# Altium PCB Project 9 Group 76.PcbDoc
Units mm, origin at the board's own origin, x right, y up, seen from the top; angles counter-clockwise.
Board outline 245.62 x 130.05 mm, 2 copper layers (Top Layer, Bottom Layer); 69 components, 100 nets, 332 pads, 92 vias.
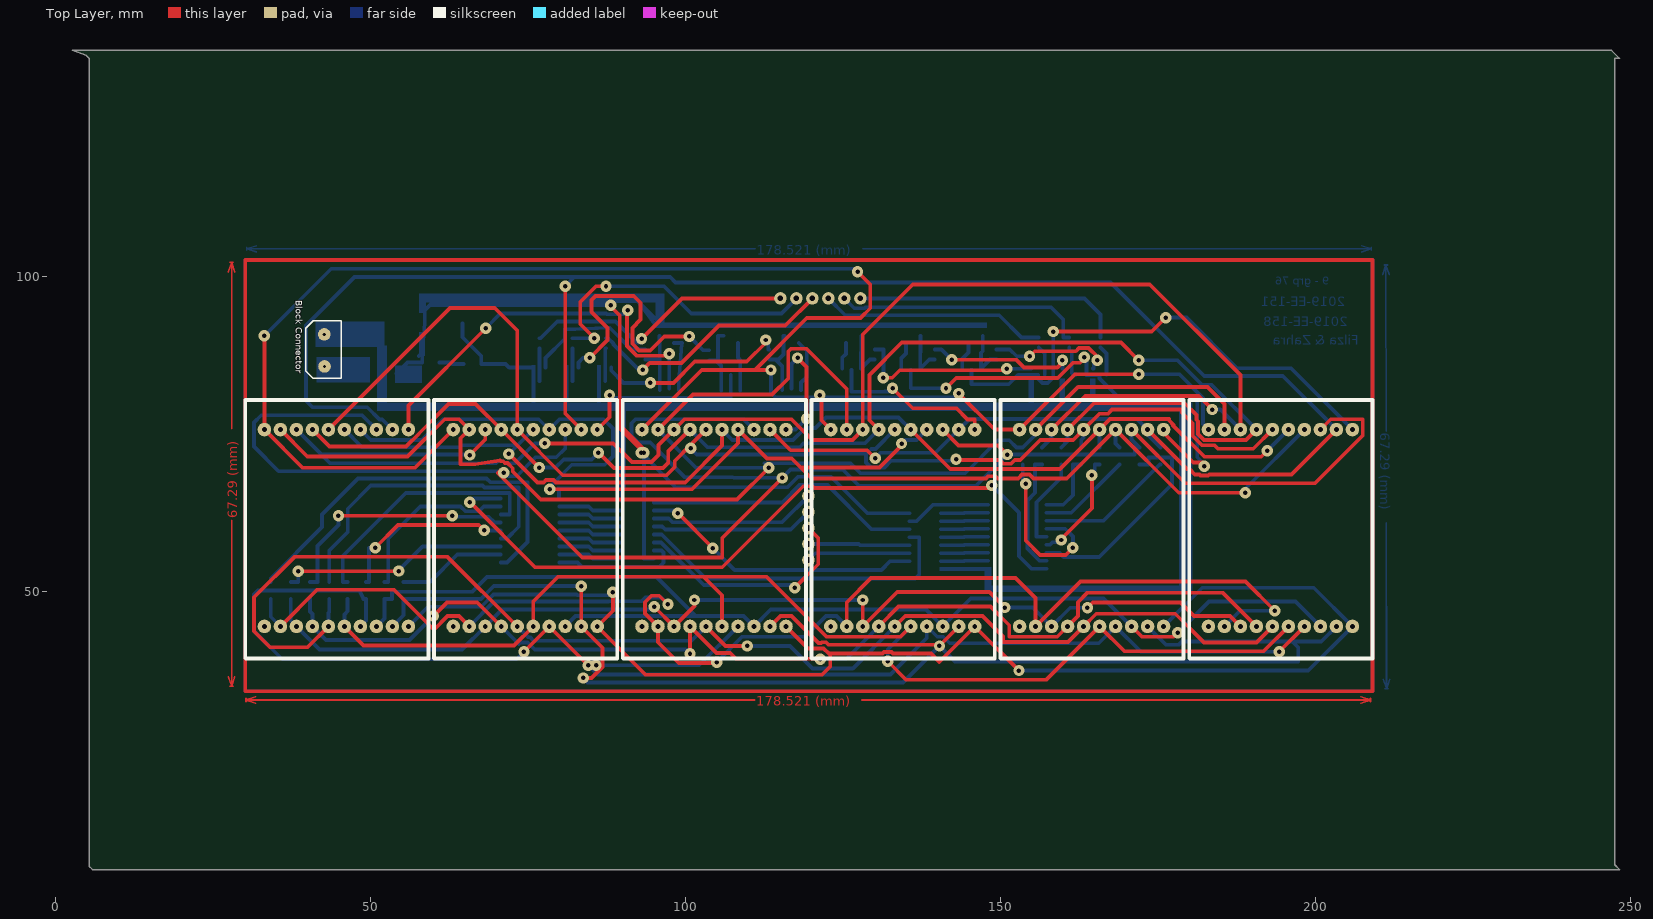
[diagram p0: Top Layer view]
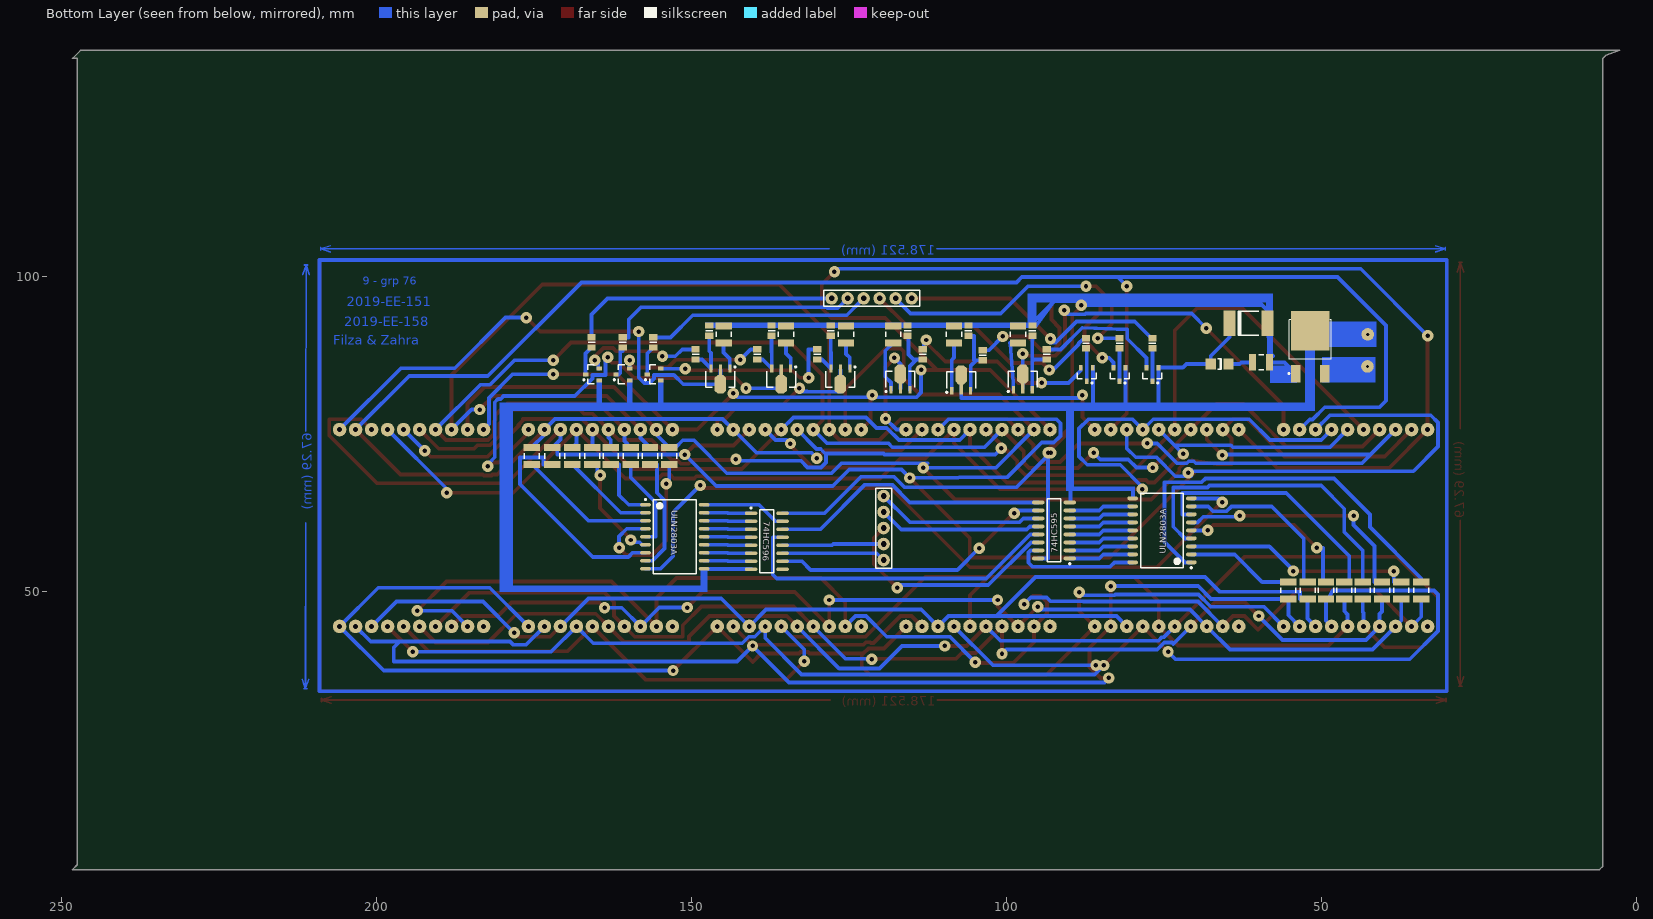
[diagram p1: Bottom Layer view, seen from below]

## Layer stack, top to bottom
Top Layer: signal copper 0.0356
Dielectric: dielectric 0.32, FR-4, Dk 4.8
Bottom Layer: signal copper 0.0356

## Board outline
2.667,135.89 247.015,135.89 248.285,134.62 247.523,134.62 247.523,6.604 248.285,5.842 5.842,5.842 5.334,6.35 5.334,134.62 4.826,135.128

## Design rules (kind name [scope] priority, off if disabled: settings)
Clearance [All] p1: gap=0.254
PolygonConnect [All] p1: connectstyle=Relief reliefconductorwidth=0.254 reliefentries=4 polygonreliefangle="90 Angle"
RoutingVias [All] p1: holewidth=0.711 width=1.8 viastyle="Through Hole" minholewidth=0.711 minwidth=1.8 maxholewidth=0.711 maxwidth=1.8
SilkscreenOverComponentPads [All] p1: minsilkscreentomaskgap=0.254
SolderMaskExpansion [All] p1: expansion=0.102
Width [All] p1: maxlimit=0.7 minlimit=0.5 preferedwidth=0.6 minimp=50.000000 maximp=50.000000 favimp=50.000000
27 further rules are at their usual default settings.

## Components (designator, comment, footprint, x,y, rotation, side; value= is the part's Value field where it differs from the comment)
74HC595 "Comment" SOIC127P602-16AN 92.456,59.69 r0 bottom
74HC596 "Comment" SOIC127P602-16AN 138.049,57.974 r180 bottom
ULN2803A "Comment" SOIC127P1030-18AL 152.654,58.674 r180 bottom
ULN2803A "Comment" SOIC127P1030-18AL 75.311,59.69 r0 bottom
? "Comment" "Alphanumeric display" 44.577,60.071 r0 top
? "Comment" "Alphanumeric display" 74.549,60.071 r0 top
? "Comment" "Alphanumeric display" 104.521,60.071 r0 top
? "Comment" "Alphanumeric display" 134.493,60.071 r0 top
? "Comment" "Alphanumeric display" 164.465,60.071 r0 top
? "Comment" "Alphanumeric display" 194.437,60.071 r0 top
? "Comment" SOT89L 116.84,83.693 r90 bottom
? "Comment" SOT89L 107.188,83.566 r90 bottom
? "Comment" SOT89L 97.409,83.693 r90 bottom
? "Comment" SOT89L 145.415,83.693 r270 bottom
? "Comment" SOT89L 135.763,83.693 r270 bottom
? "Comment" SOT89L 126.365,83.693 r270 bottom
? "Comment" SOT95P240-3RL 87.249,84.455 r270 bottom
? "Comment" SOT95P240-3RL 82.042,84.455 r270 bottom
? "Comment" SOT95P240-3RL 76.835,84.455 r270 bottom
? "Comment" SOT95P240-3RL 155.956,84.455 r0 bottom
? "Comment" SOT95P240-3RL 160.909,84.455 r0 bottom
? "Comment" SOT95P240-3RL 165.735,84.455 r0 bottom
? "Comment" RESC3225L 34.163,50.165 r90 bottom
? "Comment" RESC3225L 37.338,50.165 r90 bottom
? "Comment" RESC3225L 40.386,50.165 r90 bottom
? "Comment" RESC3225L 43.434,50.165 r90 bottom
? "Comment" RESC3225L 46.355,50.165 r90 bottom
? "Comment" RESC3225L 49.276,50.165 r90 bottom
? "Comment" RESC3225L 52.197,50.165 r90 bottom
? "Comment" RESC3225L 55.245,50.165 r90 bottom
? "Comment" RESC3225L 153.543,71.501 r90 bottom
? "Comment" RESC3225L 156.591,71.501 r90 bottom
? "Comment" RESC3225L 159.639,71.501 r90 bottom
? "Comment" RESC3225L 162.814,71.501 r90 bottom
? "Comment" RESC3225L 165.735,71.501 r90 bottom
? "Comment" RESC3225L 168.91,71.501 r90 bottom
? "Comment" RESC3225L 172.085,71.501 r90 bottom
? "Comment" RESC3225L 175.387,71.501 r90 bottom
? "Comment" RESC3225L 98.171,90.805 r90 bottom
? "Comment" RESC3225L 108.331,90.805 r90 bottom
? "Comment" RESC3225L 117.983,90.805 r90 bottom
? "Comment" RESC3225L 125.476,90.805 r90 bottom
? "Comment" RESC3225L 135.001,90.805 r90 bottom
? "Comment" RESC3225L 144.907,90.805 r90 bottom
? "Comment" RESC3225L 59.563,86.36 r180 bottom
? "Comment" RESC2012L 95.885,91.405 r270 bottom
? "Comment" RESC2012L 106.045,91.405 r270 bottom
? "Comment" RESC2012L 115.697,91.405 r270 bottom
? "Comment" RESC2012L 127.889,91.405 r270 bottom
? "Comment" RESC2012L 137.287,91.405 r270 bottom
? "Comment" RESC2012L 147.193,91.405 r270 bottom
? "Comment" RESC2012L 149.352,87.63 r270 bottom
? "Comment" RESC2012L 139.573,87.63 r270 bottom
? "Comment" RESC2012L 130.048,87.63 r270 bottom
? "Comment" RESC2012L 113.284,87.63 r270 bottom
? "Comment" RESC2012L 103.759,87.503 r270 bottom
? "Comment" RESC2012L 93.599,87.63 r270 bottom
? "Comment" RESC2012L 87.376,89.408 r270 bottom
? "Comment" RESC2012L 82.042,89.408 r270 bottom
? "Comment" RESC2012L 76.835,89.408 r270 bottom
? "Comment" RESC2012L 156.083,89.535 r270 bottom
? "Comment" RESC2012L 160.909,89.535 r270 bottom
? "Comment" RESC2012L 165.862,89.535 r270 bottom
? "Comment" "PCB Block Connector" 42.672,88.265 r270 top
? "Comment" CAPC7238L 61.595,92.583 r180 bottom
? "Comment" *DPAK228P998X235-3N 51.781,88.9 r180 bottom
? "Comment" CD3216-1206 66.167,86.106 r180 bottom
? "Comment" HDR1X5 119.507,65.151 r270 bottom
? "Comment" HDR1X6 127.762,96.52 r180 bottom

## Footprints (in the part's own frame and the unit in brackets; to place one, negate y for a bottom-side part, rotate by r counter-clockwise, add the part's x,y. Pads: shape width x height; smd on the part's side, far side on the other; paste and mask are expansions set on the pad)
*DPAK228P998X235-3N [mm]
  rect 1.5x2.8 smd: 1(-2.28,-4.34) 3(2.28,-4.34)
  rect 6.1x6.3 smd: 2(0,2.48)
  silkscreen extent -3.52,-4.42 3.33,4.2
"Alphanumeric display" [mil] "20 pins (10 on each side)"
  round 85 hole 30: 1(-450,-615) 2(-350,-615) 3(-250,-615) 4(-150,-615) 5(-50,-615) 6(50,-615) 7(150,-615) 8(250,-615) 9(350,-615) 10(450,-615) 11(450,615) 12(350,615) 13(250,615) 14(150,615) 15(50,615) 16(-50,615) 17(-150,615) 18(-250,615) 19(-350,615) 20(-450,615)
  silkscreen extent -570,-815 575,800
CAPC7238L [mm] "Chip Capacitor, Body 7.2x3.8mm, IPC High Density"
  rect 1.9x4 smd: 1(-3,0) 2(3,0)
  silkscreen extent -1.65,-1.9 1.65,1.9, body extent -3.8,-2.1 3.8,2.1, height 3.18
CD3216-1206 [mm] "Chip Diode; Body 3.2 x 1.6 mm (LxW typ)"
  rect 1.6x1.8 smd: 1(-1.4,0) 2(1.4,0)
  silkscreen extent -0.3,-0.8 0.3,0.8
HDR1X5 [mm] "Connector; Header; 5 Position"
  round 2 hole 0.9: 1(0,0) 2(2.54,0) 3(5.08,0) 4(7.62,0) 5(10.16,0)
  silkscreen extent -1.27,-1.27 11.43,1.27
HDR1X6 [mm] "Connector; Header; 6 Position"
  round 2 hole 0.9: 1(0,0) 2(2.54,0) 3(5.08,0) 4(7.62,0) 5(10.16,0) 6(12.7,0)
  silkscreen extent -1.27,-1.27 13.97,1.27
"PCB Block Connector" [mm]
  round 2 hole 0.5: 1(-2.547,-0.023) 2(2.547,0.023)
  silkscreen extent -4.7,-2.94 4.44,2.65
RESC2012L [mm] "Chip Resistor, Body 2.0x1.3mm, IPC High Density"
  rect 1x1.3 smd: 1(-0.8,0) 2(0.8,0)
  silkscreen extent 0,-0.55 0,0.55, body extent -1.07,-0.7 1.07,0.7, height 0.65
RESC3225L [mm] "Chip Resistor, Body 3.2x2.5mm, IPC High Density"
  rect 1.1x2.6 smd: 1(-1.35,0) 2(1.35,0)
  silkscreen extent -0.4,-1.2 0.4,1.2, body extent -1.68,-1.32 1.68,1.32, height 0.71
SOIC127P602-16AN [mm] "SOIC, 16-Leads, Body 9.9x3.9mm, Pitch 1.27mm, IPC Medium Density"
  oval 2x0.6 smd: 1(-2.5,4.445) 2(-2.5,3.175) 3(-2.5,1.905) 4(-2.5,0.635) 5(-2.5,-0.635) 6(-2.5,-1.905) 7(-2.5,-3.175) 8(-2.5,-4.445) 9(2.5,-4.445) 10(2.5,-3.175) 11(2.5,-1.905) 12(2.5,-0.635) 13(2.5,0.635) 14(2.5,1.905) 15(2.5,3.175) 16(2.5,4.445)
  silkscreen extent -2.62,-5 1.1,5.42, body extent -2,-5 2,5, height 1.73
SOIC127P1030-18AL [mm] "SOIC, 18-Leads, Body 11.6x7.5mm, Pitch 1.27mm, IPC High Density"
  oval 1.7x0.6 smd: 1(-4.65,5.08) 2(-4.65,3.81) 3(-4.65,2.54) 4(-4.65,1.27) 5(-4.65,0) 6(-4.65,-1.27) 7(-4.65,-2.54) 8(-4.65,-3.81) 9(-4.65,-5.08) 10(4.65,-5.08) 11(4.65,-3.81) 12(4.65,-2.54) 13(4.65,-1.27) 14(4.65,0) 15(4.65,1.27) 16(4.65,2.54) 17(4.65,3.81) 18(4.65,5.08)
  silkscreen extent -4.77,-5.9 3.4,6.05, body extent -3.8,-5.85 3.8,5.85, height 2.65
SOT89L [mm] "SOT89, 3-Leads, Body 4.5x2.4 mm, Pitch 1.5mm, Lead Span 4.1mm, IPC High Density"
  rect 1.2x0.5 smd: 1(-1.7,1.5) 3(-1.7,-1.5)
  rect 1.6x0.5 smd: 2(-1.5,0)
  oct 3x1.8 smd: 2(0.8,0)
  silkscreen extent -2.07,-2.3 1.3,2.43, body extent -1.3,-2.3 1.3,2.3, height 1.6
SOT95P240-3RL [mm] "SOT23, 3-Leads, Body 2.9x1.3mm, Pitch 0.95mm, Lead Span 2.3mm - Reverse Pinning, IPC High Density"
  rect 0.85x0.6 smd: 1(1.075,0) 2(-1.075,-0.95) 3(-1.075,0.95)
  silkscreen extent -0.3,-1.5 1.47,1.5, body extent -0.7,-1.5 0.7,1.5, height 1.1

## Via types
v1: diameter 1.8, hole 0.711, Top Layer to Bottom Layer, 92 vias

## Nets (pads, with @x,y where several pads share a name; then routed paths per layer and width w, separated by ;. In a path a pad name is that pad's centre, name@x,y a point inside that pad or via, vN(x,y) a via of type N, cw(c..) or ccw(c..) an arc to the next point about the centre after c; other vN are vias at no path point)
1: ?.2@34.163,51.515 ULN2803A.1@70.661,54.61 | length 64.4
  Bottom Layer w0.6: ?.2@34.163,51.515 34.163,52.07 42.31,60.217 42.31,62.23 48.025,67.945 68.423,67.945 69.027,67.342 74.93,67.342 74.93,57.861 71.679,54.61 ULN2803A.1@70.661,54.61
2: ?.2@37.338,51.515 ULN2803A.3@70.661,57.15 | length 36.7
  Top Layer w0.6: v1(38.532,53.213) 54.432,53.213 v1(54.458,53.238)
  Bottom Layer w0.6: ?.2@37.338,51.515 38.532,51.515 v1(38.532,53.213) ; v1(54.458,53.238) 54.458,53.34 58.268,57.15 ULN2803A.3@70.661,57.15
3: ?.2@40.386,51.515 ULN2803A.6@70.661,60.96 | length 39.3
  Top Layer w0.6: v1(44.907,62.027) v1(62.941,62.027)
  Bottom Layer w0.6: ?.2@40.386,51.515 41.58,51.515 41.58,57.226 44.907,60.554 v1(44.907,62.027) ; v1(62.941,62.027) 63.096,61.872 68.761,61.872 69.672,60.96 ULN2803A.6@70.661,60.96
4: ?.2@43.434,51.515 ULN2803A.4@70.661,58.42 | length 51.5
  Bottom Layer w0.6: ?.2@43.434,51.515 43.434,56.49 46.376,59.432 46.376,63.14 50.038,66.802 67.754,66.802 68.069,66.488 73.533,66.488 73.533,60.284 71.669,58.42 ULN2803A.4@70.661,58.42
5: ?.2@46.355,51.515 ULN2803A.7@70.661,62.23 | length 40.4
  Bottom Layer w0.6: ?.2@46.355,51.515 45.593,51.515 45.593,55.638 55.595,65.64 67.197,65.64 67.203,65.634 72.085,65.634 72.085,62.23 ULN2803A.7@70.661,62.23
6: ?.2@49.276,51.515 ULN2803A.5@70.661,59.69 | length 28.6
  Top Layer w0.6: v1(50.749,56.947) 54.331,60.528 67.183,60.528 v1(68.021,59.69)
  Bottom Layer w0.6: ?.2@49.276,51.515 49.759,51.515 49.759,56.947 v1(50.749,56.947) ; v1(68.021,59.69) ULN2803A.5@70.661,59.69
7: ?.2@52.197,51.515 ULN2803A.8@70.661,63.5 | length 28.1
  Bottom Layer w0.6: ?.2@52.197,51.515 52.807,51.515 52.807,58.42 57.887,63.5 64.295,63.5 65.069,62.726 67.203,62.726 67.977,63.5 ULN2803A.8@70.661,63.5
8: ?.2@55.245,51.515 ULN2803A.2@70.661,55.88 | length 17.2
  Bottom Layer w0.6: ?.2@55.245,51.515 59.411,51.515 63.776,55.88 ULN2803A.2@70.661,55.88
9: ?.1@175.387,70.151 ULN2803A.3@157.304,61.214 | length 21.8
  Bottom Layer w0.6: ULN2803A.3@157.304,61.214 166.346,61.214 175.283,70.151 ?.1@175.387,70.151
10: ?.1@172.085,70.151 ULN2803A.7@157.304,56.134 | length 35.5
  Bottom Layer w0.6: ULN2803A.7@157.304,56.134 159.35,56.134 160.028,55.457 165.667,55.457 177.241,67.031 177.241,71.272 173.507,71.272 173.507,70.151 ?.1@172.085,70.151
11: ?.1@168.91,70.151 ULN2803A.2@157.304,62.484 | length 14.8
  Bottom Layer w0.6: ULN2803A.2@157.304,62.484 161.243,62.484 ?.1@168.91,70.151
12: ?.1@165.735,70.151 ULN2803A.6@157.304,57.404 | length 17.8
  Top Layer w0.6: v1(159.639,58.166) 159.487,58.166 164.516,63.195 v1(164.516,68.453)
  Bottom Layer w0.6: ULN2803A.6@157.304,57.404 157.861,57.404 158.267,57.81 159.131,57.81 159.487,58.166 v1(159.639,58.166) ; v1(164.516,68.453) 164.973,68.91 164.973,70.151 ?.1@165.735,70.151
13: ?.1@162.814,70.151 ULN2803A.1@157.304,63.754 | length 11
  Bottom Layer w0.6: ULN2803A.1@157.304,63.754 159.969,63.754 161.493,65.278 161.493,70.151 ?.1@162.814,70.151
14: ?.1@159.639,70.151 ULN2803A.5@157.304,58.674 | length 14.7
  Bottom Layer w0.6: ULN2803A.5@157.304,58.674 155.702,58.674 155.702,64.166 159.639,68.103 ?.1@159.639,70.151
15: ?.1@156.591,70.151 ULN2803A.8@157.304,54.864 | length 18.8
  Bottom Layer w0.6: ?.1@156.591,70.151 155.448,70.151 155.448,69.304 155.488,69.264 155.488,65.66 154.28,64.451 154.28,56.794 156.21,54.864 ULN2803A.8@157.304,54.864
16: ?.1@153.543,70.151 ULN2803A.4@157.304,59.944 | length 27.7
  Top Layer w0.6: v1(154.026,67.107) 154.026,58.064 156.286,55.804 160.376,55.804 v1(161.493,56.921)
  Bottom Layer w0.6: ?.1@153.543,70.151 153.543,67.589 v1(154.026,67.107) ; ULN2803A.4@157.304,59.944 160.274,59.944 161.493,58.725 v1(161.493,56.921)
A1: ?.2@162.814,72.851 ?.16 | length 205.9
  Top Layer w0.6: ?.16@43.307,75.692 62.611,94.996 69.723,94.996 73.279,91.44 73.279,75.692 80.518,68.453 97.002,68.453 98.282,69.733 98.282,70.723 v1@100.813,73.254 ; v1(100.813,72.72) v1@100.813,73.254 ; ?.16@103.251,75.692 v1@100.813,73.254 ; v1(142.951,70.968) 143.053,70.866 149.887,70.866 150.477,70.276 151.681,70.276 152.272,70.866 153.143,70.866 156.318,74.041 161.544,74.041 163.195,75.692 165.71,78.207 167.056,78.207 167.716,78.867 178.816,78.867 178.816,78.359 180.52,76.655 180.52,74.662 181.977,73.205 183.97,73.205 184.531,72.644 190.119,72.644 ?.16@193.167,75.692
  Bottom Layer w0.6: v1(100.813,72.72) 101.778,71.755 119.385,71.755 119.512,71.882 128.772,71.882 ; 129.159,72.269 128.772,71.882 ; ?.16@133.223,75.692 130.15,72.619 ; v1(142.951,70.968) 142.723,70.739 132.639,70.739 131.572,69.672 129.458,69.672 128.645,70.485 128.645,71.755 128.772,71.882 ; ?.2@162.814,72.851 162.814,74.066 163.195,74.447 ?.16@163.195,75.692 ; 130.15,72.619 130.13,72.599 129.489,72.599 129.508,72.619 130.15,72.619
A2: ?.2@168.91,72.851 ?.14 | length 228.5
  Top Layer w0.6: v1(78.461,66.218) 101.016,66.218 108.331,73.533 108.331,75.692 112.922,71.101 116.875,71.101 118.304,69.672 ; v1(134.29,73.482) 134.29,73.152 130.81,69.672 118.304,69.672 ; v1(188.849,65.659) 188.849,66.294 188.214,65.659 178.308,65.659 168.275,75.692 160.528,67.945 155.244,67.945 154.628,68.561 153.423,68.561 152.808,67.945 149.579,67.945 149.243,68.281 148.039,68.281 147.702,67.945 120.031,67.945 118.304,69.672
  Bottom Layer w0.6: ?.14@48.387,75.692 50.038,74.041 58.166,74.041 61.468,77.343 76.708,77.343 78.359,75.692 80.01,77.343 86.995,77.343 88.467,75.871 88.467,71.411 87.165,70.109 81.945,70.109 78.461,66.624 v1(78.461,66.218) ; v1(134.29,73.482) 134.866,74.058 136.669,74.058 ?.14@138.303,75.692 ; ?.14@168.275,75.692 168.275,73.486 ?.2@168.91,72.851 ; v1(188.849,65.659) 188.849,66.294 ?.14@198.247,75.692
B: ?.2@175.387,72.851 ?.12 | length 335
  Top Layer w0.6: v1(80.899,98.476) 80.899,78.232 ?.12@83.439,75.692 ; ?.12@113.411,75.692 116.688,72.415 128.829,72.415 v1(130.099,71.145) ; ?.12@173.355,75.692 179.61,69.437 179.991,69.437 180.848,68.58 181.586,68.58 181.77,68.396 182.974,68.396 183.158,68.58 196.215,68.58 ?.12@203.327,75.692
  Bottom Layer w0.6: ?.12@53.467,75.692 51.841,77.318 51.41,77.318 49.479,79.248 40.767,79.248 39.751,80.264 39.751,92.202 47.453,99.904 82.328,99.904 ; v1(80.899,98.476) 82.328,99.904 ; v1(130.099,71.145) 130.958,72.004 139.695,72.004 143.383,75.692 145.059,77.368 171.679,77.368 173.355,75.692 173.355,74.883 ?.2@175.387,72.851 ; ?.12@203.327,75.692 194.818,84.201 182.336,84.201 167.477,99.06 98.425,99.06 97.581,99.904 82.328,99.904
b1: ?.2@93.599,86.83 ?.2@95.885,90.605 ?.3@95.909,81.993 | length 11.1
  Bottom Layer w0.6: ?.2@93.599,86.83 95.536,86.83 95.909,86.457 ; ?.2@95.885,90.605 95.885,89.991 95.909,89.967 95.909,86.457 ; ?.3@95.909,81.993 95.909,86.457
b2: ?.2@103.759,86.703 ?.2@106.045,90.605 ?.3@105.688,81.866 | length 11.4
  Bottom Layer w0.6: ?.2@103.759,86.703 104.775,86.703 ; ?.3@105.688,81.866 105.688,85.79 104.775,86.703 ; ?.2@106.045,90.605 105.156,90.605 105.156,86.703 104.775,86.703
b3: ?.2@113.284,86.83 ?.2@115.697,90.605 ?.3@115.34,81.993 | length 11
  Bottom Layer w0.6: ?.2@113.284,86.83 114.3,86.83 ; ?.3@115.34,81.993 115.34,85.79 114.3,86.83 ; ?.2@115.697,90.605 115.545,90.605 115.545,87.63 114.745,86.83 114.3,86.83
b4: ?.2@127.889,90.605 ?.2@130.048,86.83 ?.3@127.865,85.393 | length 8
  Bottom Layer w0.6: ?.2@127.889,90.605 127.889,88.01 127.865,87.986 127.865,85.393 129.302,86.83 ?.2@130.048,86.83
b5: ?.2@137.287,90.605 ?.2@139.573,86.83 ?.3@137.263,85.393 | length 8.1
  Bottom Layer w0.6: ?.2@137.287,90.605 137.287,88.01 137.263,87.986 137.263,85.393 138.7,86.83 ?.2@139.573,86.83
b6: ?.2@147.193,90.605 ?.2@149.352,86.83 ?.3@146.915,85.393 | length 8.4
  Bottom Layer w0.6: ?.2@147.193,90.605 147.193,88.137 146.915,87.859 146.915,85.393 148.352,86.83 ?.2@149.352,86.83
C: ?.2@153.543,72.851 ?.19 | length 248.9
  Top Layer w0.6: ?.19@35.687,75.692 39.954,71.425 55.869,71.425 61.769,77.326 64.025,77.326 65.659,75.692 64.281,74.314 64.281,70.193 66.569,70.193 70.558,70.793 70.682,70.669 71.064,70.669 71.356,70.377 71.76,70.377 72.574,69.563 72.574,69.031 77.013,64.592 108.179,64.592 v1(113.233,69.647) ; ?.19@95.631,75.692 101.194,81.255 113.741,81.255 116.307,83.82 116.307,88.087 116.745,88.525 119.228,88.525 125.603,82.15 ?.19@125.603,75.692 ; ?.19@155.575,75.692 162.331,82.448 182.88,82.448 185.547,79.781 ?.19@185.547,75.692
  Bottom Layer w0.6: ?.19@95.631,75.692 101.68,69.643 v1@113.23,69.643 ; v1(113.233,69.647) 112.522,70.358 126.205,70.358 127.791,68.772 144.401,68.772 149.625,73.996 151.398,73.996 152.543,72.851 153.543,72.851 155.575,74.883 ?.19@155.575,75.692
c1: ?.1@93.599,88.43 ?.2@77.785,85.53 | length 21.5
  Bottom Layer w0.6: ?.2@77.785,85.53 77.785,87.071 80.823,90.109 80.823,91.589 87.958,91.874 91.402,88.43 ?.1@93.599,88.43
c2: ?.1@103.759,88.303 ?.2@82.992,85.53 | length 44.3
  Top Layer w0.6: v1(84.811,87.097) 87.63,89.916 87.63,91.846 85.09,94.386 85.09,96.278 85.719,96.907 91.789,96.907 92.874,95.823 92.874,93.153 91.561,91.84 91.561,89.326 92.621,88.265 94.412,88.265 96.622,90.475 v1(100.609,90.475)
  Bottom Layer w0.6: ?.2@82.992,85.53 82.992,86.36 83.729,87.097 v1(84.811,87.097) ; v1(100.609,90.475) 102.781,88.303 ?.1@103.759,88.303
c3: ?.1@113.284,88.43 ?.2@88.199,85.53 | length 30.7
  Top Layer w0.6: v1(94.437,83.109) 98.095,83.109 101.473,86.487 109.728,86.487 112.725,89.484 v1(112.725,89.916)
  Bottom Layer w0.6: ?.2@88.199,85.53 88.199,85.08 90.17,83.109 v1(94.437,83.109) ; v1(112.725,89.916) 113.132,89.51 113.132,88.43 ?.1@113.284,88.43
c4: ?.1@130.048,88.43 ?.2@154.881,85.405 | length 29.9
  Top Layer w0.6: v1(131.414,83.929) 132.808,83.929 133.995,85.115 150.774,85.115 v1(151.003,85.344)
  Bottom Layer w0.6: ?.1@130.048,88.43 131.414,88.43 v1(131.414,83.929) ; v1(151.003,85.344) 151.171,85.344 ?.2@154.881,85.405
c5: ?.1@139.573,88.43 ?.2@159.834,85.405 | length 23.4
  Top Layer w0.6: v1(142.246,86.798) 152.46,86.798 153.711,85.547 159.029,85.547 159.842,86.36 v1(159.842,86.69)
  Bottom Layer w0.6: ?.1@139.573,88.43 140.614,88.43 v1(142.246,86.798) ; ?.2@159.834,85.405 159.842,85.405 v1(159.842,86.69)
c6: ?.1@149.352,88.43 ?.2@164.66,85.405 | length 19.8
  Top Layer w0.6: v1(154.61,87.325) 155.429,88.144 161.966,88.144 162.474,88.652 163.976,88.652 165.354,87.274 v1(165.354,86.69)
  Bottom Layer w0.6: ?.1@149.352,88.43 151.486,88.43 152.59,87.325 v1(154.61,87.325) ; ?.2@164.66,85.405 164.795,85.405 164.795,86.131 v1(165.354,86.69)
com: ?.10 | length 221
  Top Layer w0.6: v1(88.468,49.886) 88.468,46.939 85.979,44.45 93.65,36.779 121.666,36.779 122.987,38.1 122.987,40.024 121.92,40.957 ; ?.10@115.951,44.45 119.444,40.957 121.92,40.957 ; v1(152.933,37.44) 145.923,44.45 140.284,38.811 138.963,40.132 132.942,40.132 132.708,40.367 131.503,40.367 131.268,40.132 122.745,40.132 121.92,40.957
  Bottom Layer w0.6: ?.10@56.007,44.45 59.131,47.574 67.575,47.574 69.531,49.53 82.704,49.53 82.837,49.397 87.979,49.397 v1(88.468,49.886) ; v1(152.933,37.44) 198.857,37.44 205.867,44.45 199.72,50.597 182.042,50.597 ?.10@175.895,44.45
common: ULN2803A.9 | length 116.1
  Top Layer w0.6: v1(65.761,64.186) 76.098,53.848 105.842,53.848 118.699,66.705 120.151,66.705 120.435,66.421 148.234,66.421 v1(148.641,66.827)
  Bottom Layer w0.6: v1(65.761,64.186) 66.345,64.77 ULN2803A.9@70.661,64.77 ; v1(148.641,66.827) 152.959,62.509 152.959,55.575 154.94,53.594 ULN2803A.9@157.304,53.594
D1: ?.2@159.639,72.851 ?.17 | length 224.1
  Top Layer w0.6: ?.17@40.767,75.692 43.459,73 55.625,73 57.64,75.015 57.64,75.039 62.357,79.756 66.675,79.756 70.739,75.692 v1(76.759,69.672) ; v1(86.182,72.034) 88.621,69.596 96.437,69.596 97.242,70.401 97.242,72.223 ?.17@100.711,75.692 ; ?.17@130.683,75.692 129.21,77.165 129.21,84.379 134.337,89.506 169.142,89.506 v1(171.933,86.716) ; ?.17@160.655,75.692 164.846,79.883 179.248,79.883 181.099,78.032 181.099,77.284 181.374,77.009 181.374,75.015 182.33,74.059 184.324,74.059 188.993,74.058 ?.17@190.627,75.692
  Bottom Layer w0.6: v1(76.759,69.672) 79.375,69.672 80.666,70.963 85.111,70.963 v1(86.182,72.034) ; ?.17@100.711,75.692 103.505,72.898 118.132,72.898 118.777,73.543 128.534,73.543 ?.17@130.683,75.692 ; ?.2@159.639,72.851 160.655,73.867 ?.17@160.655,75.692 ; v1(171.933,86.716) 178.105,86.716 182.016,82.804 183.515,82.804 ?.17@190.627,75.692
D2: ?.2@165.735,72.851 ?.15 | length 181.2
  Top Layer w0.6: v1(71.958,71.831) 76.479,67.31 77.497,67.31 77.858,67.672 79.063,67.672 79.425,67.31 99.957,67.31 105.791,73.144 ?.15@105.791,75.692 ; ?.15@135.763,75.692 142.033,69.422 159.465,69.422 165.735,75.692 167.396,77.353 176.784,77.353 176.784,77.113 177.471,76.426 ; 177.399,76.355 182.38,71.374 191.389,71.374 v1(192.365,72.35)
  Bottom Layer w0.6: ?.15@45.847,75.692 48.641,72.898 64.078,72.898 64.381,73.201 73.328,73.201 ; v1(71.958,71.831) 73.328,73.201 ; ?.15@75.819,75.692 73.328,73.201 ; ?.15@105.791,75.692 107.425,74.058 117.086,74.058 118.993,75.965 120.656,75.965 122.313,77.622 133.833,77.622 ?.15@135.763,75.692 ; ?.2@165.735,72.851 ?.15@165.735,75.692 ; v1(192.365,72.35) ?.15@195.707,75.692
dp: ?.20 | length 294.5
  Top Layer w0.6: v1(33.147,90.602) 33.147,75.692 39.192,69.647 57.074,69.647 ?.20@63.119,75.692 ; ?.20@93.091,75.692 102.565,85.166 111.023,85.166 ; v1(113.563,85.166) 111.023,85.166 ; v1(121.31,81.178) 121.579,80.91 121.579,77.176 ?.20@123.063,75.692 ; v1(127.305,100.762) 129.337,98.73 129.337,94.971 127.762,93.396 119.253,93.396 111.023,85.166 ; v1(143.358,81.432) 149.098,75.692 153.035,75.692 161.823,84.48 v1(171.933,84.48)
  Bottom Layer w0.6: v1(33.147,90.602) 43.764,101.219 126.848,101.219 v1(127.305,100.762) ; v1(113.563,85.166) 113.563,81.559 114.3,80.823 121.31,80.823 v1(121.31,81.178) 121.672,80.817 142.742,80.817 v1(143.358,81.432) ; v1(171.933,84.48) 178.41,84.48 182.169,80.721 182.169,76.53 ?.20@183.007,75.692
ds: 74HC595.14 ?.3@119.507,60.071 | length 37.1
  Top Layer w0.6: v1(117.323,50.571) 121.082,54.331 121.082,58.496 ?.3@119.507,60.071
  Bottom Layer w0.6: 74HC595.14 96.114,57.785 102.895,51.003 116.891,51.003 v1(117.323,50.571)
E: ?.2@172.085,72.851 ?.13 | length 319.5
  Top Layer w0.6: v1(71.12,68.834) 71.12,68.961 70.866,69.215 70.587,69.215 70.18,68.809 83.591,55.397 105.816,55.397 105.816,58.496 v1(115.341,68.021) ; ?.13@140.843,75.692 143.348,73.187 149.622,73.187 v1(151.079,71.73) ; ?.13@170.815,75.692 179.324,67.183 199.923,67.183 207.518,74.778 207.518,77.343 202.438,77.343 ?.13@200.787,75.692
  Bottom Layer w0.6: ?.13@50.927,75.692 48.641,77.978 32.639,77.978 31.496,76.835 31.496,73 35.408,69.088 70.46,69.088 70.587,69.215 70.866,69.215 71.12,68.961 v1(71.12,68.834) ; v1@70.689,68.3 73.21,68.3 76.2,71.29 79.479,71.29 80.899,72.71 ?.13@80.899,75.692 ; ?.13@110.871,75.692 109.22,77.343 92.075,77.343 91.44,76.708 91.44,74.676 92.488,73.628 94.393,73.628 99.832,68.189 v1(115.341,68.021) 116.662,69.342 124.968,69.342 127.584,66.726 146.075,66.726 v1(151.079,71.73) 171.323,71.73 171.323,72.851 172.085,72.851 170.815,74.121 ?.13@170.815,75.692
F: ?.2@156.591,72.851 ?.18 | length 260.5
  Top Layer w0.6: v1(65.735,71.653) 68.199,74.117 ?.18@68.199,75.692 ; v1(77.673,73.508) 88.538,73.508 91.491,70.555 94.615,70.555 95.707,71.647 95.707,73.228 98.171,75.692 99.822,77.343 116.84,77.343 120.142,74.041 126.492,74.041 128.143,75.692 128.143,90.805 136.068,98.73 173.711,98.73 188.087,84.353 ?.18@188.087,75.692 ; ?.18@158.115,75.692 163.449,81.026 181.483,81.026 v1(183.636,78.873)
  Bottom Layer w0.6: ?.18@38.227,75.692 42.355,71.564 ; v1(65.735,71.653) 65.634,71.755 42.164,71.755 43.561,70.358 69.953,70.358 70.264,70.669 71.064,70.669 71.375,70.358 72.923,70.358 76.073,73.508 v1(77.673,73.508) ; ?.2@156.591,72.851 158.115,74.375 ?.18@158.115,75.692 ; v1(183.636,78.873) 184.906,78.873 ?.18@188.087,75.692
G1: ?.1@34.163,48.815 ?.2@35.687,44.45 ?.2@65.659,44.45 ?.2@95.631,44.45 ?.2@125.603,44.45 ?.2@155.575,44.45 ?.2@185.547,44.45 | length 215.5
  Top Layer w0.6: ?.2@35.687,44.45 41.516,50.279 53.701,50.279 60.063,43.917 62.23,46.084 64.025,46.084 ?.2@65.659,44.45 ; v1(97.206,47.955) 95.834,49.327 94.615,49.327 93.574,48.285 93.574,46.507 95.631,44.45 95.631,41.935 98.933,38.633 104.826,38.633 v1(104.978,38.786) ; ?.2@125.603,44.45 125.603,48.26 129.464,52.121 152.4,52.121 155.575,48.946 155.575,44.45 162.712,51.587 188.9,51.587 v1(193.548,46.939)
  Bottom Layer w0.6: ?.1@34.163,48.815 34.163,45.974 ?.2@35.687,44.45 ; ?.2@65.659,44.45 69.596,48.387 87.821,48.387 87.866,48.432 93.002,48.432 93.599,49.028 96.133,49.028 v1(97.206,47.955) ; v1(104.978,38.786) 109.017,42.824 110.312,42.799 118.999,42.799 122.284,46.084 123.969,46.084 ?.2@125.603,44.45 ; ?.2@185.547,44.45 188.036,46.939 v1(193.548,46.939)
G2: ?.1@55.245,48.815 ?.9 | length 239.4
  Top Layer w0.6: v1(83.439,50.851) 83.439,44.45 86.817,41.072 86.817,37.998 85.09,36.271 v1(83.744,36.271) ; ?.9@113.411,44.45 115.062,46.101 116.84,46.101 121.13,41.811 121.539,41.811 121.662,41.935 122.311,41.935 122.717,41.529 140.132,41.529 v1(140.31,41.351) 140.31,41.377 ?.9@143.383,44.45
  Bottom Layer w0.6: ?.9@53.467,44.45 55.245,46.228 55.245,48.815 67.517,48.815 69.553,50.851 v1(83.439,50.851) ; v1(83.744,36.271) 84.455,35.56 134.518,35.56 v1(140.31,41.351) 142.767,38.894 197.282,38.894 197.282,41.097 196.342,42.037 ; ?.9@173.355,44.45 176.251,41.554 178.338,41.554 178.821,42.037 200.914,42.037 ?.9@203.327,44.45
gnd: 74HC595.8 74HC596.8 ?.1@42.649,90.812 ?.1@64.595,92.583 ?.1@67.567,86.106 ?.2@51.781,91.38 ?.3@75.885,85.53 ?.3@81.092,85.53 ?.3@86.299,85.53 ?.3@154.881,83.505 ?.3@159.834,83.505 ?.3@164.66,83.505 ULN2803A.10 | length 16.3
  Bottom Layer w0.6: ?.1@64.595,92.583 64.595,90.351 67.567,87.379 67.567,86.106 71.425,86.106 72.001,85.53 ?.3@75.885,85.53
H: ?.1@37.338,48.815 ?.3@38.227,44.45 ?.3@68.199,44.45 ?.3@98.171,44.45 ?.3@128.143,44.45 ?.3@158.115,44.45 ?.3@188.087,44.45 | length 174.4
  Top Layer w0.6: v1(95.047,47.574) 98.171,44.45 101.422,47.701 v1(101.422,48.641) ; v1(128.143,48.641) 128.143,44.45 133.604,49.911 148.234,49.911 v1(150.698,47.447) ; v1(163.805,47.422) 164.643,48.26 178.562,48.26 180.738,46.084 186.453,46.084 ?.3@188.087,44.45
  Bottom Layer w0.6: ?.1@37.338,48.815 37.338,45.339 38.227,44.45 41.91,40.767 64.516,40.767 68.199,44.45 70.866,47.117 94.59,47.117 v1(95.047,47.574) ; v1(101.422,48.641) v1(128.143,48.641) ; v1(150.698,47.447) 155.118,47.447 158.115,44.45 161.087,47.422 v1(163.805,47.422)
I: ?.1@43.434,48.815 ?.5@43.307,44.45 ?.5@73.279,44.45 ?.5@103.251,44.45 ?.5@133.223,44.45 ?.5@163.195,44.45 ?.5@193.167,44.45 | length 208.1
  Top Layer w0.6: ?.5@43.307,44.45 40.005,41.148 34.036,41.148 31.496,43.688 31.496,49.073 37.916,55.493 62.236,55.493 ?.5@73.279,44.45 ; ?.5@103.251,44.45 106.35,41.351 v1(109.779,41.351) ; ?.5@133.223,44.45 134.874,46.101 147.158,46.101 150.403,42.857 150.403,41.962 160.707,41.962 163.195,44.45 165.202,46.457 177.741,46.457 182.288,41.91 190.627,41.91 ?.5@193.167,44.45
  Bottom Layer w0.6: ?.5@43.307,44.45 43.307,46.558 43.434,46.685 ?.1@43.434,48.815 ; ?.5@73.279,44.45 74.984,42.745 75.302,42.745 75.883,42.164 100.965,42.164 ?.5@103.251,44.45 ; v1(109.779,41.351) 116.574,41.351 120.136,37.789 126.562,37.789 ?.5@133.223,44.45
IN: ?.2@42.695,85.718 ?.3@49.501,84.56
J: ?.1@49.276,48.815 ?.7 | length 239.5
  Top Layer w0.6: v1(74.346,40.437) 78.359,44.45 v1(84.557,38.252) 84.557,38.278 v1(85.798,38.278) ; v1(194.234,40.437) ?.7@198.247,44.45
  Bottom Layer w0.6: ?.7@48.387,44.45 49.276,45.339 49.276,48.815 48.895,48.815 48.209,50.165 32.131,50.165 31.496,49.53 31.496,43.713 35.966,39.243 73.152,39.243 v1(74.346,40.437) ; v1(84.557,38.252) 85.979,36.83 132.545,36.83 138.303,42.588 138.303,44.45 139.948,42.805 140.912,42.805 141.934,41.783 165.608,41.783 168.275,44.45 172.288,40.437 v1(194.234,40.437) ; v1(85.798,38.278) 102.159,38.278 ?.7@108.331,44.45
K: ?.1@40.386,48.815 ?.4@40.767,44.45 ?.4@70.739,44.45 ?.4@100.711,44.45 ?.4@130.683,44.45 ?.4@160.655,44.45 ?.4@190.627,44.45 | length 180.9
  Top Layer w0.6: v1(59.969,46.101) 62.128,48.26 66.929,48.26 ?.4@70.739,44.45 ; v1(100.711,40.107) 100.711,44.45 104.921,40.24 107.112,40.24 108.033,39.319 121.514,39.319 121.437,39.243 v1(121.412,39.243) ; ?.4@130.683,44.45 133.833,47.6 148.412,47.6 151.384,44.628 151.384,42.816 159.021,42.816 160.655,44.45 162.294,46.089 162.294,48.273 163.83,49.809 185.268,49.809 ?.4@190.627,44.45
  Bottom Layer w0.6: ?.1@40.386,48.815 40.386,46.812 40.767,46.431 40.767,44.45 42.926,42.291 56.159,42.291 v1(59.969,46.101) ; ?.4@70.739,44.45 73.521,41.668 73.744,41.891 74.948,41.891 76.072,40.767 100.051,40.767 v1(100.711,40.107) ; v1(121.412,39.243) 121.488,39.319 125.552,39.319 ?.4@130.683,44.45
k1: ?.1@76.835,90.208 ?.6@115.062,96.52 | length 44
  Top Layer w0.6: v1(93.015,90.094) 99.441,96.52 ?.6@115.062,96.52
  Bottom Layer w0.6: ?.1@76.835,90.208 76.987,90.208 79.642,92.862 88.875,92.862 92.227,89.51 93.015,89.51 v1(93.015,90.094)
k2: ?.1@82.042,90.208 ?.5@117.602,96.52 | length 48.3
  Top Layer w0.6: v1(85.534,90.208) 83.29,92.452 83.29,95.961 85.779,98.45 v1(87.376,98.45)
  Bottom Layer w0.6: ?.1@82.042,90.208 v1(85.534,90.208) ; v1(87.376,98.45) 96.591,98.45 100.909,94.132 115.214,94.132 ?.5@117.602,96.52
k3: ?.1@87.376,90.208 ?.4@120.142,96.52 | length 39.6
  Top Layer w0.6: v1(93.193,85.166) 94.304,86.278 99.36,86.278 105.306,92.224 115.846,92.224 ?.4@120.142,96.52
  Bottom Layer w0.6: ?.1@87.376,90.208 87.709,90.208 88.58,89.337 88.58,89.22 92.634,85.166 v1(93.193,85.166)
k4: ?.1@156.083,90.335 ?.3@122.682,96.52 | length 36
  Bottom Layer w0.6: ?.3@122.682,96.52 125.349,93.853 149.809,93.853 153.327,90.335 ?.1@156.083,90.335
k5: ?.1@160.909,90.335 ?.2@125.222,96.52 | length 40.1
  Bottom Layer w0.6: ?.2@125.222,96.52 126.776,94.966 128.406,94.966 128.563,95.123 158.041,95.123 159.95,93.214 159.95,90.335 ?.1@160.909,90.335
k6: ?.1@127.762,96.52 ?.1@165.862,90.335 | length 42.8
  Bottom Layer w0.6: ?.1@127.762,96.52 163.322,96.52 165.862,93.98 ?.1@165.862,90.335
L: ?.1@46.355,48.815 ?.6@45.847,44.45 ?.6@75.819,44.45 ?.6@105.791,44.45 ?.6@135.763,44.45 ?.6@165.735,44.45 ?.6@195.707,44.45 | length 194.9
  Top Layer w0.6: ?.6@45.847,44.45 48.895,41.402 72.771,41.402 75.819,44.45 75.819,48.387 79.756,52.324 102.87,52.324 ; ?.6@105.791,44.45 105.791,49.403 102.87,52.324 ; v1(132.105,38.913) 135.052,35.966 157.251,35.966 165.735,44.45 169.672,40.513 191.77,40.513 ?.6@195.707,44.45 ; ?.6@135.763,44.45 134.112,42.799 122.4,42.799 112.875,52.324 102.87,52.324
  Bottom Layer w0.6: ?.6@45.847,44.45 45.847,46.355 46.355,46.863 ?.1@46.355,48.815 ; v1(132.105,38.913) 132.105,40.792 ?.6@135.763,44.45
M: ?.1@52.197,48.815 ?.8 | length 190.8
  Top Layer w0.6: ?.8@170.815,44.45 172.449,42.816 177.521,42.816 v1(178.13,43.426)
  Bottom Layer w0.6: ?.8@50.927,44.45 52.197,45.72 52.197,48.815 53.391,48.815 53.391,49.936 66.109,49.936 68.478,52.305 95.393,52.305 101.597,46.101 ; ?.8@80.899,44.45 82.55,46.101 101.597,46.101 ; ?.8@170.815,44.45 166.364,48.901 145.294,48.901 140.843,44.45 138.176,47.117 113.538,47.117 110.871,44.45 109.22,46.101 101.597,46.101 ; v1(178.13,43.426) 183.117,48.412 196.825,48.412 ?.8@200.787,44.45
MR: 74HC595.10 74HC596.10 | length 45.1
  Top Layer w0.6: v1(98.781,62.433) v1(104.343,56.871)
  Bottom Layer w0.6: 74HC595.10 98.349,62.865 v1(98.781,62.433) ; v1(104.343,56.871) 107.798,53.416 131.089,53.416 132.472,54.799 74HC596.10
OE: 74HC595.13 74HC596.13 | length 52.8
  Bottom Layer w0.6: 74HC595.13 96.215,59.055 103.2,52.07 136.474,52.07 137.109,52.705 137.109,58.609 74HC596.13
QA1: 74HC596.15 ULN2803A.18@148.004,63.754 | length 13.5
  Bottom Layer w0.6: 74HC596.15 136.689,61.149 139.294,63.754 ULN2803A.18@148.004,63.754
QA2: 74HC596.1 ULN2803A.17@148.004,62.484 | length 7.5
  Bottom Layer w0.6: 74HC596.1 144.221,62.419 144.286,62.484 ULN2803A.17@148.004,62.484
QB: 74HC596.2 ULN2803A.16@148.004,61.214 | length 7.5
  Bottom Layer w0.6: 74HC596.2 144.221,61.149 144.286,61.214 ULN2803A.16@148.004,61.214
QC: 74HC596.3 ULN2803A.15@148.004,59.944 | length 7.5
  Bottom Layer w0.6: 74HC596.3 144.221,59.879 144.286,59.944 ULN2803A.15@148.004,59.944
QD1: 74HC596.4 ULN2803A.14@148.004,58.674 | length 7.5
  Bottom Layer w0.6: 74HC596.4 144.221,58.609 144.286,58.674 ULN2803A.14@148.004,58.674
QD2: 74HC596.5 ULN2803A.13@148.004,57.404 | length 7.5
  Bottom Layer w0.6: 74HC596.5 144.221,57.339 144.286,57.404 ULN2803A.13@148.004,57.404
QE: 74HC596.6 ULN2803A.12@148.004,56.134 | length 7.5
  Bottom Layer w0.6: 74HC596.6 144.221,56.069 144.286,56.134 ULN2803A.12@148.004,56.134
QF: 74HC596.7 ULN2803A.11@148.004,54.864 | length 7.5
  Bottom Layer w0.6: 74HC596.7 144.221,54.799 144.286,54.864 ULN2803A.11@148.004,54.864
QG1: 74HC595.15 ULN2803A.18@79.961,54.61 | length 20.4
  Bottom Layer w0.6: ULN2803A.18@79.961,54.61 82.855,54.61 83.541,53.924 95.885,53.924 96.52,54.559 96.52,56.171 96.176,56.515 74HC595.15
QG2: 74HC595.1 ULN2803A.17@79.961,55.88 | length 10.3
  Bottom Layer w0.6: ULN2803A.17@79.961,55.88 84.633,55.88 85.268,55.245 74HC595.1
QH: 74HC595.2 ULN2803A.16@79.961,57.15 | length 10.3
  Bottom Layer w0.6: ULN2803A.16@79.961,57.15 84.633,57.15 85.268,56.515 74HC595.2
QI: 74HC595.3 ULN2803A.15@79.961,58.42 | length 10.3
  Bottom Layer w0.6: ULN2803A.15@79.961,58.42 84.633,58.42 85.268,57.785 74HC595.3
QJ: 74HC595.4 ULN2803A.14@79.961,59.69 | length 10.3
  Bottom Layer w0.6: ULN2803A.14@79.961,59.69 84.633,59.69 85.268,59.055 74HC595.4
QK: 74HC595.5 ULN2803A.13@79.961,60.96 | length 10.3
  Bottom Layer w0.6: ULN2803A.13@79.961,60.96 84.633,60.96 85.268,60.325 74HC595.5
QL: 74HC595.6 ULN2803A.12@79.961,62.23 | length 10.3
  Bottom Layer w0.6: ULN2803A.12@79.961,62.23 84.633,62.23 85.268,61.595 74HC595.6
QM: 74HC595.7 ULN2803A.11@79.961,63.5 | length 10.3
  Bottom Layer w0.6: ULN2803A.11@79.961,63.5 84.633,63.5 85.268,62.865 74HC595.7
r1: ?.1@98.171,89.455 ?.1@98.909,81.993 | length 8.7
  Bottom Layer w0.6: ?.1@98.171,89.455 99.422,89.455 99.413,89.353 98.909,83.186 ?.1@98.909,81.993
r2: ?.1@108.331,89.455 ?.1@108.688,81.866 | length 7.7
  Bottom Layer w0.6: ?.1@108.331,89.455 108.331,87.122 108.688,86.765 ?.1@108.688,81.866
r3: ?.1@117.983,89.455 ?.1@118.34,81.993 | length 8.4
  Bottom Layer w0.6: ?.1@117.983,89.455 119.235,88.203 119.235,84.081 118.34,83.186 ?.1@118.34,81.993
r4: ?.1@124.865,85.393 ?.1@125.476,89.455 | length 4.3
  Bottom Layer w0.6: ?.1@124.865,85.393 124.865,87.097 125.476,87.708 ?.1@125.476,89.455
r5: ?.1@134.263,85.393 ?.1@135.001,89.455 | length 4.4
  Bottom Layer w0.6: ?.1@134.263,85.393 134.263,87.046 135.001,87.784 ?.1@135.001,89.455
r6: ?.1@143.915,85.393 ?.1@144.907,89.455 | length 4.5
  Bottom Layer w0.6: ?.1@143.915,85.393 143.915,86.919 144.907,87.911 ?.1@144.907,89.455
res: ?.1@60.913,86.36 ?.2@64.767,86.106 | length 4
  Bottom Layer w0.6: ?.1@60.913,86.36 62.713,86.36 62.967,86.106 ?.2@64.767,86.106
ser1: 74HC595.9 74HC596.14 | length 44.7
  Bottom Layer w0.6: 74HC595.9 115.367,64.135 118.186,66.954 122.444,66.954 129.52,59.879 74HC596.14
ser2: 74HC596.9
SHCP: 74HC595.11 ?.1@119.507,65.151 | length 26.5
  Bottom Layer w0.6: 74HC595.11 97.324,61.595 97.946,60.973 115.329,60.973 ?.1@119.507,65.151
SHCP1: 74HC596.11 ?.5@119.507,54.991 | length 16.5
  Bottom Layer w0.6: ?.5@119.507,54.991 120.585,56.069 74HC596.11
STCP: 74HC595.12 ?.2@119.507,62.611 | length 25.9
  Bottom Layer w0.6: 74HC595.12 96.263,60.325 96.771,59.817 116.713,59.817 ?.2@119.507,62.611
STCP2: 74HC596.12 ?.4@119.507,57.531 | length 16.1
  Bottom Layer w0.6: ?.4@119.507,57.531 127.508,57.531 127.7,57.339 74HC596.12
t1: ?.2@97.409,82.193 ?.2@97.409,84.493 ?.11@56.007,75.692 | length 64.1
  Top Layer w0.6: ?.11@56.007,75.692 56.007,79.527 v1(68.275,91.796) ; v1(90.805,94.615) 90.983,94.615 91.008,94.59 90.707,94.288 90.707,88.97 92.275,87.401 97.079,87.401 v1(97.409,87.732)
  Bottom Layer w0.6: v1(68.275,91.796) 70.587,94.107 87.428,94.107 87.536,93.999 90.418,93.999 90.83,94.412 90.83,94.59 v1(90.805,94.615) ; ?.2@97.409,82.193 97.409,84.493 v1(97.409,87.732)
t2: ?.2@107.188,82.066 ?.2@107.188,84.366 ?.11@85.979,75.692 | length 29.4
  Top Layer w0.6: ?.11@85.979,75.692 87.935,77.648 v1(87.935,81.178)
  Bottom Layer w0.6: v1(87.935,81.178) 88.417,80.696 107.188,80.696 107.188,82.066 ?.2@107.188,84.366
t3: ?.2@116.84,82.193 ?.2@116.84,84.493 ?.11@115.951,75.692 | length 19.5
  Top Layer w0.6: v1(117.78,87.071) 119.202,85.649 v1(119.202,77.419)
  Bottom Layer w0.6: ?.11@115.951,75.692 117.475,75.692 v1(119.202,77.419) ; ?.2@116.84,82.193 116.84,84.493 116.84,86.131 v1(117.78,87.071)
t4: ?.2@126.365,82.893 ?.2@126.365,85.193 ?.11@145.923,75.692 | length 27.3
  Top Layer w0.6: v1(132.867,82.271) 136.068,79.07 143.027,79.07 144.78,77.318 145.923,77.318 ?.11@145.923,75.692
  Bottom Layer w0.6: ?.2@126.365,85.193 126.365,82.893 126.365,81.686 131.623,81.686 131.674,81.737 132.867,81.737 v1(132.867,82.271)
t5: ?.2@135.763,82.893 ?.2@135.763,85.193 ?.11@175.895,75.692 | length 75.4
  Top Layer w0.6: v1(141.351,82.271) 142.967,83.887 159.096,83.887 161.519,86.309 162.636,86.309 163.322,86.995 v1(163.322,87.198) ; ?.11@175.895,75.692 175.895,75.184 180.594,70.485 182.118,70.485 182.372,70.231 v1(182.372,69.85)
  Bottom Layer w0.6: ?.2@135.763,85.193 135.763,82.893 135.763,82.271 v1(141.351,82.271) ; v1(163.322,87.198) 163.678,86.843 163.678,84.379 165.735,84.379 165.735,83.82 168.529,81.026 179.832,81.026 180.294,80.564 180.696,80.564 181.229,80.031 181.229,71.298 182.042,70.485 182.118,70.485 182.372,70.231 v1(182.372,69.85)
t6: ?.2@145.415,82.893 ?.2@145.415,85.193 ?.11@205.867,75.692 | length 80.2
  Top Layer w0.6: v1(158.394,91.262) 174.015,91.262 v1(176.225,93.472)
  Bottom Layer w0.6: ?.2@145.415,85.193 145.415,82.893 145.415,82.88 151.308,82.88 152.806,84.379 155.956,84.379 155.956,83.82 156.693,83.083 157.505,83.083 158.388,83.966 158.388,91.256 v1(158.394,91.262) ; v1(176.225,93.472) 179.546,93.472 187.597,85.42 196.139,85.42 ?.11@205.867,75.692
vcc: 74HC595.16 74HC596.16 ?.1@54.061,84.56 ?.1@95.885,92.205 ?.1@106.045,92.205 ?.1@115.697,92.205 ?.1@127.889,92.205 ?.1@137.287,92.205 ?.1@147.193,92.205 ?.2@58.213,86.36 ?.2@58.595,92.583 ?.2@98.171,92.155 ?.2@108.331,92.155 ?.2@117.983,92.155 ?.2@125.476,92.155 ?.2@135.001,92.155 ?.2@144.907,92.155 | length 225.5
  Top Layer w0.6: v1(88.138,95.453) 88.138,95.226 89.554,93.81 89.554,76.409 ; v1(92.964,72.009) 93.125,72.218 v1@93.152,72.253 ; v1(93.396,72.009) v1@93.152,72.253 ; 89.554,76.409 89.554,75.851 v1@93.152,72.253 ; 89.554,76.409 93.396,72.568 v1@93.152,72.253
  Bottom Layer w0.6: ?.1@54.061,84.56 55.861,86.36 58.213,86.36 58.213,87.931 ; 57.658,87.376 58.213,87.931 ; v1(92.964,72.009) v1@93.396,71.577 ; v1(93.396,72.009) v1@93.396,71.577 ; 74HC595.16 93.396,55.245 v1@93.396,71.577 ; ?.1@95.885,92.205 95.317,92.205 92.472,96.061 ; ?.2@135.001,92.155 125.476,92.155 117.983,92.155 108.331,92.155 98.171,92.155 96.378,92.155 92.472,96.061 ; 74HC596.16 128.894,62.419 123.114,68.199 117.856,68.199 116.205,66.548 98.425,66.548 v1@93.396,71.577 ; 58.213,87.931 58.595,92.583 58.595,94.615 59.433,95.453 ; 59.433,95.453 v1(88.138,95.453) v1@87.53,96.061 ; 59.433,95.453 60.041,96.061 v1@87.53,96.061 ; v1@87.53,96.061 87.538,96.069 92.464,96.069 92.472,96.061
x1: ?.1@76.835,83.38 ?.2@76.835,88.608 | length 5.2
  Bottom Layer w0.6: ?.1@76.835,83.38 ?.2@76.835,88.608
x2: ?.1@82.042,83.38 ?.2@82.042,88.608 | length 5.2
  Bottom Layer w0.6: ?.1@82.042,83.38 ?.2@82.042,88.608
x3: ?.1@87.249,83.38 ?.2@87.376,88.608 | length 5.4
  Bottom Layer w0.6: ?.1@87.249,83.38 87.249,85.636 87.243,85.643 87.243,88.608 ?.2@87.376,88.608
x4: ?.1@157.031,84.455 ?.2@156.083,88.735 | length 4.7
  Bottom Layer w0.6: ?.2@156.083,88.735 157.031,87.787 ?.1@157.031,84.455
x5: ?.1@161.984,84.455 ?.2@160.909,88.735 | length 5.2
  Bottom Layer w0.6: ?.2@160.909,88.735 160.909,88.135 161.302,88.135 161.302,84.697 161.544,84.455 ?.1@161.984,84.455
x6: ?.1@166.81,84.455 ?.2@165.862,88.735 | length 4.7
  Bottom Layer w0.6: ?.2@165.862,88.735 166.81,87.787 ?.1@166.81,84.455
pads on no net: ?.1@33.147,44.45 ?.1@63.119,44.45 ?.1@93.091,44.45 ?.1@123.063,44.45 ?.1@153.035,44.45 ?.1@183.007,44.45
copper on no net: | length 1447.8
  Top Layer w0.254: 27.432,36.469 27.94,34.945 ; 27.432,100.711 27.94,102.235 ; 27.686,34.945 28.194,34.945 ; 27.686,102.235 28.194,102.235 ; 27.94,61.328 27.94,34.945 ; 27.94,75.852 27.94,102.235 ; 28.448,36.469 27.94,34.945 ; 28.448,100.711 27.94,102.235 ; 30.224,32.512 30.224,33.02 ; 31.748,32.258 30.224,32.766 ; 31.748,33.274 30.224,32.766 ; 110.952,32.766 30.224,32.766 ; 128.016,32.766 208.745,32.766 ; 207.221,32.258 208.745,32.766 ; 207.221,33.274 208.745,32.766 ; 208.745,32.512 208.745,33.02
  Top Layer w0.6: 30.099,34.163 30.099,102.616 209.042,102.616 209.042,34.163 30.099,34.163
  Bottom Layer w0.254: 30.351,104.14 30.351,104.648 ; 31.875,103.886 30.351,104.394 ; 31.875,104.902 30.351,104.394 ; 111.079,104.394 30.351,104.394 ; 128.143,104.394 208.872,104.394 ; 207.348,103.886 208.872,104.394 ; 207.348,104.902 208.872,104.394 ; 208.872,104.14 208.872,104.648 ; 210.68,100.297 211.186,101.822 ; 210.777,36.055 211.288,34.532 ; 210.932,101.822 211.44,101.823 ; 211.034,34.532 211.542,34.533 ; 211.226,75.439 211.186,101.822 ; 211.248,60.915 211.288,34.532 ; 211.696,100.299 211.186,101.822 ; 211.793,36.057 211.288,34.532
  Bottom Layer w0.6: 30.099,34.163 30.099,102.616 209.042,102.616 209.042,34.163 30.099,34.163

## Other copper
Top Layer:
  text "67.29 (mm)" at 28.854,61.582 h1.52 r90
  text "178.521 (mm)" at 111.206,31.852 h1.52
Bottom Layer:
  rectangle net gnd: 147.447,49.911 148.59,53.721
  rectangle net gnd: 147.447,49.911 180.467,50.927
  rectangle net gnd: 178.308,49.911 180.467,79.883
  rectangle net gnd: 140.335,53.213 148.59,53.848
  rectangle net gnd: 164.211,79.502 165.1,83.82
  rectangle net gnd: 159.385,79.121 160.274,83.82
  rectangle net gnd: 154.432,79.502 155.321,83.82
  rectangle net gnd: 80.772,79.756 81.407,85.979
  rectangle net gnd: 75.565,78.74 76.2,85.979
  rectangle net gnd: 85.979,79.756 86.614,85.979
  rectangle net gnd: 89.281,66.675 90.551,78.994
  rectangle net gnd: 52.578,78.613 180.467,80.01
  rectangle net gnd: 51.054,78.613 52.578,89.027
  rectangle net vcc: 95.25,91.821 96.647,95.885
  rectangle net vcc: 58.801,95.885 96.647,97.282
  rectangle net vcc: 57.658,94.234 58.801,97.282
  rectangle net vcc: 57.658,87.376 58.674,91.186
  rectangle net vcc: 53.848,83.058 58.166,85.852
  rectangle net IN: 41.402,83.185 49.911,87.249
  rectangle net gnd: 41.275,88.773 52.197,92.837
  rectangle net gnd: 79.629,64.643 80.264,66.167
  rectangle net gnd: 89.535,64.135 90.17,65.913
  rectangle net gnd: 79.629,65.913 90.551,66.675
  rectangle net vcc: 95.758,91.821 147.828,92.71
  text "178.521 (mm)" at 111.333,103.48 h1.52
  text "9 - grp 76" at 202.184,98.679 h1.25
  text "2019-EE-151" at 204.724,95.25 h1.52
  text "2019-EE-158" at 205.105,92.075 h1.52
  text "Filza & Zahra" at 206.883,89.154 h1.52
  text "67.29 (mm)" at 210.312,75.184 h1.52 r270.09

## Text inside footprints (layer, text, board x,y; h text height)
?: Top Overlay "Block Connector" at 38.1,96.266 h1.02 r270